# Altium PCB MU-RK3576J-MB.PcbDoc (part 1 of 2)
Units mm, origin at the board's own origin, x right, y up, seen from the top; angles counter-clockwise.
Board outline 110 x 90 mm, 10 copper layers (GTL_TOP_Hi, G1_L2_GND, G2_L3_GND, G3_L4_Hi, G4_L5_GND_PWR, G5_L6_GND_PWR, G6_L7_Hi, G7_L8_GND_PWR, G8_L9_GND, GBL_BOTTOM_Hi), stack 1.848 mm thick; 5 components, 737 nets, 20 pads, 0 vias.
Unrouted connection lines stored in the file: 705.
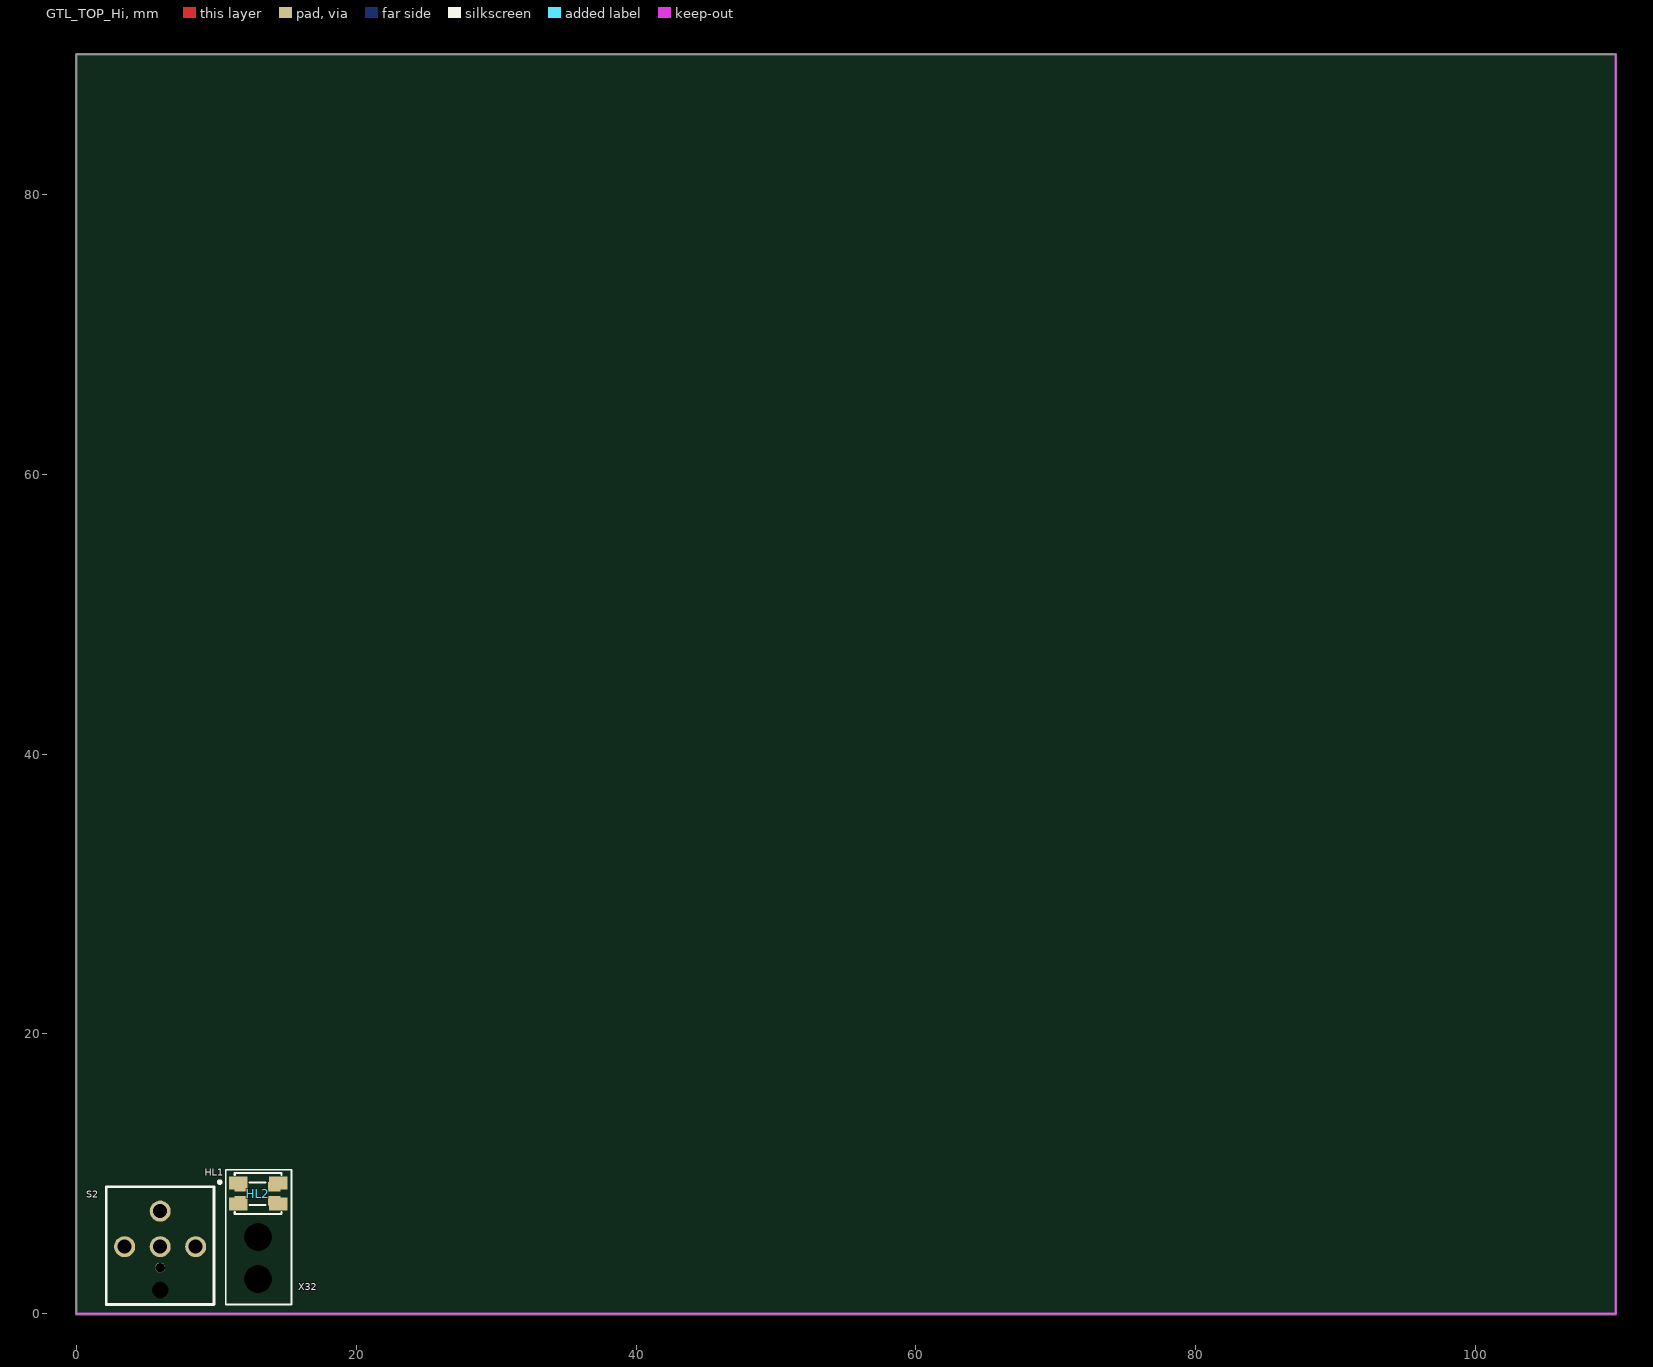
[diagram p0: GTL_TOP_Hi view]
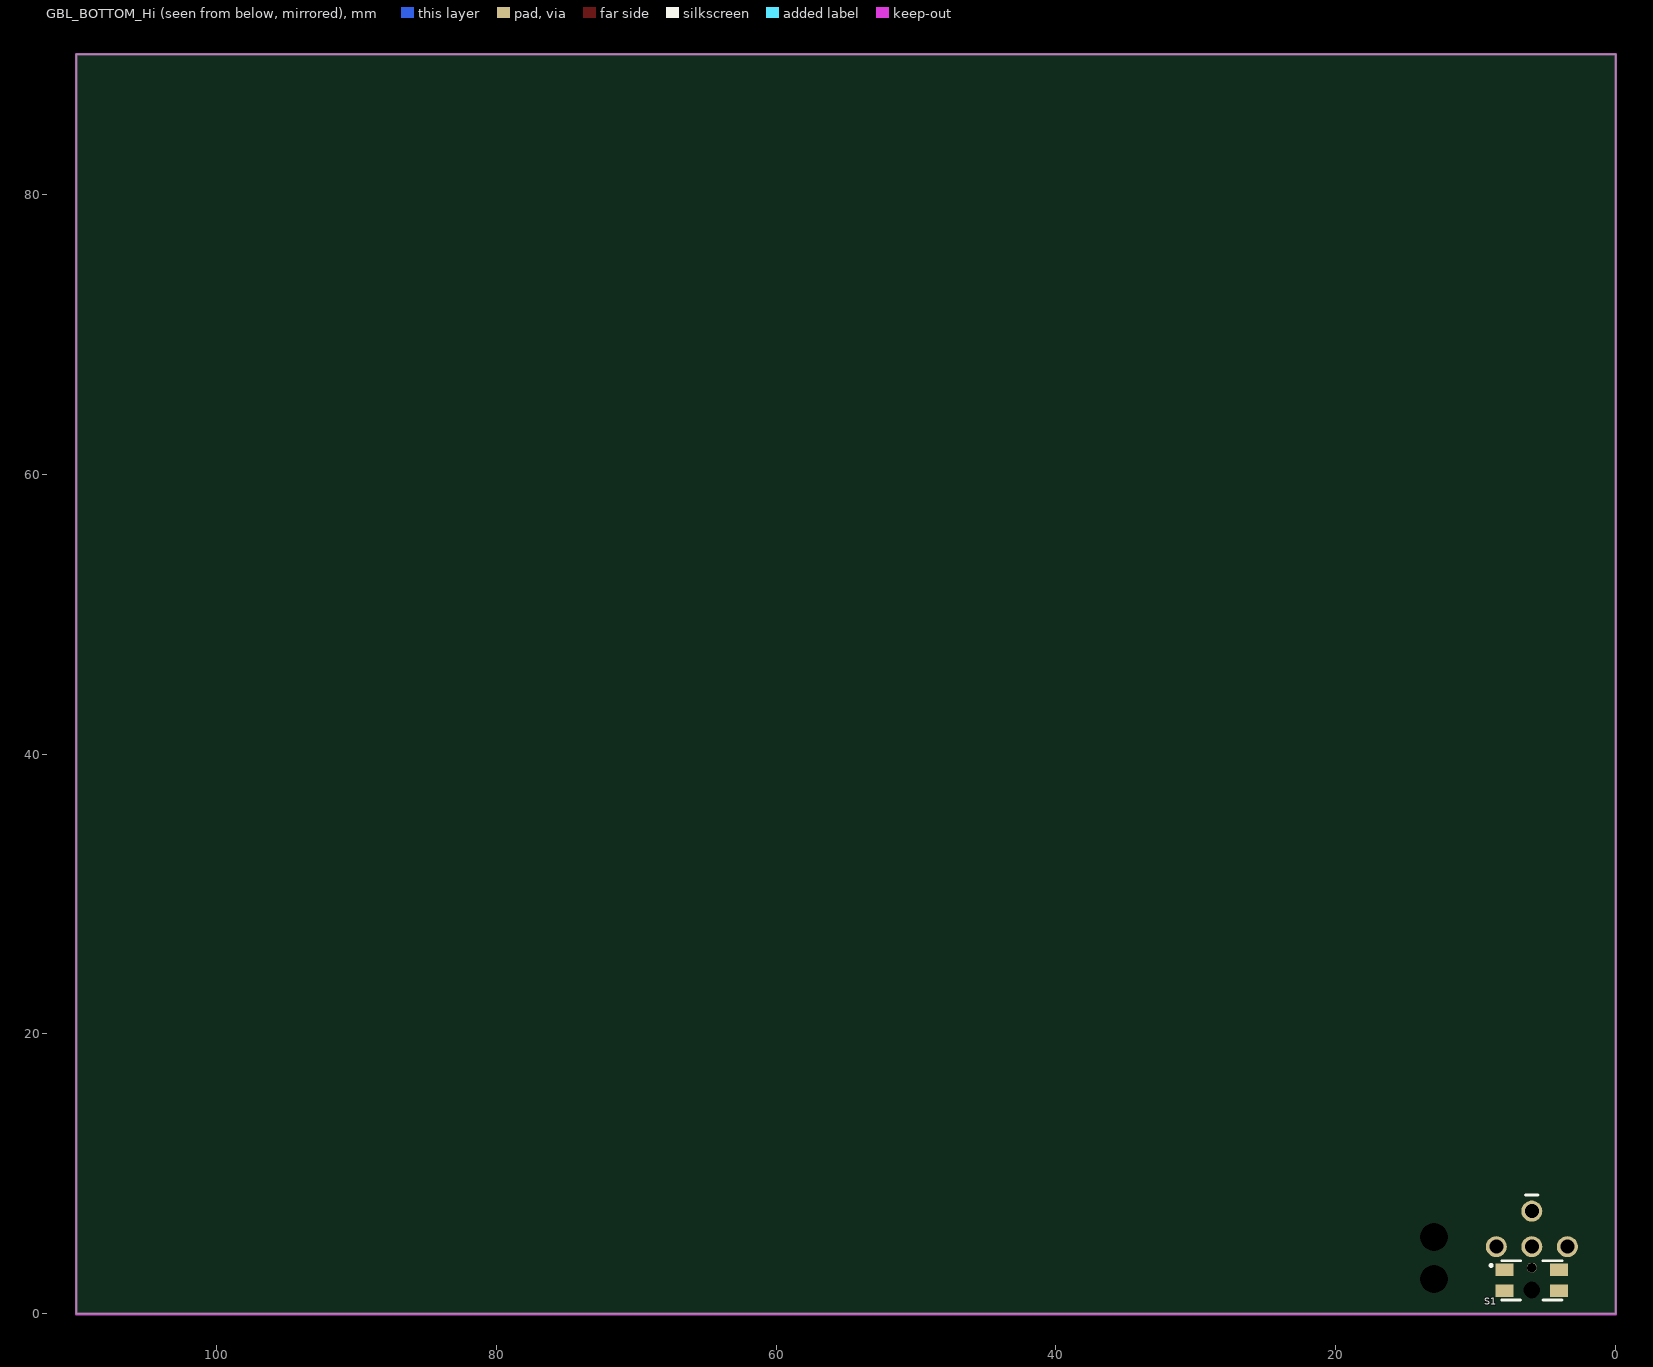
[diagram p1: GBL_BOTTOM_Hi view, seen from below]

## Layer stack, top to bottom
Top Solder: solder mask 0.0254, Solder Resist, Dk 3.5
GTL_TOP_Hi: signal copper 0.018
Dielectric 1: prepreg 0.045, FR4_HiTg170 PR, Dk 3.9
Dielectric1: prepreg 0.045, FR4_HiTg170 PR, Dk 3.9
G1_L2_GND: signal copper 0.035
Dielectric 2: prepreg 0.069, FR4_HiTg170 PR, Dk 4.2
Dielectric2: prepreg 0.069, FR4_HiTg170 PR, Dk 4.2
G2_L3_GND: signal copper 0.035
Dielectric3: core 0.25, FR4 HiTg170, Dk 4.3
G3_L4_Hi: signal copper 0.035
Dielectric 4: prepreg 0.069, FR4_HiTg170 PR, Dk 4.2
Dielectric4: prepreg 0.069, FR4_HiTg170 PR, Dk 4.2
G4_L5_GND_PWR: signal copper 0.035
Dielectric5: core 0.3, FR4 HiTg170, Dk 4.5
G5_L6_GND_PWR: signal copper 0.035
Dielectric6: prepreg 0.069, FR4_HiTg170 PR, Dk 4.2
Dielectric 6: prepreg 0.069, FR4_HiTg170 PR, Dk 4.2
G6_L7_Hi: signal copper 0.035
Dielectric7: core 0.25, FR4 HiTg170, Dk 4.3
G7_L8_GND_PWR: signal copper 0.035
Dielectric 8: prepreg 0.069, FR4_HiTg170 PR, Dk 4.2
Dielectric8: prepreg 0.069, FR4_HiTg170 PR, Dk 4.2
G8_L9_GND: signal copper 0.035
Dielectric9: prepreg 0.045, FR4_HiTg170 PR, Dk 3.9
Dielectric 9: prepreg 0.045, FR4_HiTg170 PR, Dk 3.9
GBL_BOTTOM_Hi: signal copper 0.018
Bottom Solder: solder mask 0.0254, Solder Resist, Dk 3.5

## Board outline
0,0 0,90 110,90 110,0

## Design rules (kind name [scope] priority, off if disabled: settings)
BoardOutlineClearance [All] p1: gap=0.254 ignorepadtopadclearanceinfootprint=FALSE except(0: Arc-SplitContinuation Track-SplitContinuation SMDPad-SplitContinuation THPad-SplitContinuation Via-SplitContinuation Fill-SplitContinuation Region-SplitContinuation Text-SplitContinuation; 0.4: Poly-OutlineEdge Poly-CavityEdge Poly-CutoutEdge Poly-SplitBarrior Poly-SplitContinuation)
Clearance Clearance_diff [InNetClass('PCIE_CLK')or InNetClass('PCIE_Z85') or InNetClass('USB')or InNet('A_DRAM_DQS1_P') or InNet('A_DRAM_DQS1_N') or InNetClass('ETH0_MDI')or InNetClass('ETH1_MDI') vs InPolygonClass('GND_Poly_18µm')] p1: gap=0.5 ignorepadtopadclearanceinfootprint=FALSE
Clearance Clearance_IsVia [IsVia vs InLayerClass('Layer_35µm')] p2: gap=0.15 ignorepadtopadclearanceinfootprint=FALSE
Clearance GND_Poly_Layers_18µm [InPolygonClass('GND_Poly_18µm')] p3: gap=0.15 ignorepadtopadclearanceinfootprint=FALSE
Clearance GND_Poly_Layers_35µm [InPolygonClass('GND_Poly_35µm')] p4: gap=0.2 ignorepadtopadclearanceinfootprint=FALSE
Clearance Clearance_WithinRoom_35µm [WithinRoom('CPU','eMMC','ETH' ) AND InLayerClass('Layer_35µm')] p5: gap=0.15 ignorepadtopadclearanceinfootprint=FALSE
Clearance Clearance_WithinRoom_18µm [WithinRoom('CPU','eMMC','ETH') AND InLayerClass('Layer_18µm')] p6: gap=0.1 ignorepadtopadclearanceinfootprint=FALSE
Clearance Clearance_LPDDR4_35µm [WithinRoom('LPDDR4') AND InLayerClass('Layer_35µm')] p7: gap=0.15 ignorepadtopadclearanceinfootprint=FALSE
Clearance Clearance_LPDDR4_18µm [WithinRoom('LPDDR4') AND InLayerClass('Layer_18µm')] p8: gap=0.1 ignorepadtopadclearanceinfootprint=FALSE
Clearance Clearance_ETH1_MDI [InNetClass('ETH1_MDI')] p9: gap=0.1 ignorepadtopadclearanceinfootprint=FALSE except(0.3: Arc-Arc Arc-Track Track-Track)
Clearance Clearance_RGMII0 [InNetClass('RGMII0')] p10: gap=0.1 ignorepadtopadclearanceinfootprint=FALSE except(0.3: Arc-Arc Arc-Track Track-Track)
Clearance Clearance_RGMII1 [InNetClass('RGMII1')] p11: gap=0.1 ignorepadtopadclearanceinfootprint=FALSE except(0.3: Arc-Arc Arc-Track Track-Track)
Clearance Clearance_ETH0_MDI [InNetClass('ETH0_MDI')] p12: gap=0.1 ignorepadtopadclearanceinfootprint=FALSE except(0.3: Arc-Arc Arc-Track Track-Track)
Clearance Clearance_eMMC [InNetClass('eMMC')] p13: gap=0.15 ignorepadtopadclearanceinfootprint=FALSE except(0.3: Arc-Arc Arc-Track Track-Track)
Clearance Clearance_DRAM_CA_CA [InNetClass('DRAM_CA') vs InNetClass('DRAM_CA')] p14: gap=0.1 ignorepadtopadclearanceinfootprint=FALSE except(0.28: Arc-Arc Arc-Track Track-Track)
Clearance Clearance_DRAM_STROBE1_0 [InNetClass('DRAM_STROBE_0') vs InNetClass('DRAM_STROBE_1')] p15: gap=0.1 ignorepadtopadclearanceinfootprint=FALSE except(0.28: Arc-Arc Arc-Track Track-Track)
Clearance Clearance_DRAM_STROBE1_CA [InNetClass('DRAM_STROBE_1') vs InNetClass('DRAM_CA')] p16: gap=0.1 ignorepadtopadclearanceinfootprint=FALSE except(0.28: Arc-Arc Arc-Track Track-Track)
Clearance Clearance_DRAM_STROBE1 [InNetClass('DRAM_STROBE_1') vs InNetClass('DRAM_STROBE_1')] p17: gap=0.1 ignorepadtopadclearanceinfootprint=FALSE except(0.28: Arc-Arc Arc-Track Track-Track)
Clearance Clearance_DRAM_STROBE0_CA [InNetClass('DRAM_STROBE_0') vs InNetClass('DRAM_CA')] p18: gap=0.1 ignorepadtopadclearanceinfootprint=FALSE except(0.28: Arc-Arc Arc-Track Track-Track)
Clearance Clearance_DRAM_STROBE0 [InNetClass('DRAM_STROBE_0') vs InNetClass('DRAM_STROBE_0')] p19: gap=0.1 ignorepadtopadclearanceinfootprint=FALSE except(0.28: Arc-Arc Arc-Track Track-Track)
Clearance Clearance_Layers_35µm [InLayerClass('Layer_35µm')] p20: gap=0.15 ignorepadtopadclearanceinfootprint=FALSE
Clearance Clearance_Layers_18µm [InLayerClass('Layer_18µm')] p21: gap=0.1 ignorepadtopadclearanceinfootprint=FALSE
ComponentClearance [InLayerClass('New Class') vs InLayerClass('New Class')] p1: gap=0 collisioncheckmode=3 verticalgap=0 showdistances=FALSE
ComponentClearance ComponentClearance_1 [All] p2: gap=0 collisioncheckmode=3 verticalgap=0 showdistances=FALSE
DiffPairsRouting LVDS_CSI_Z100 [InNetClass('LVDS') OR InNetClass('MIPI_CSI')] p1: maxlimit=0.24 minlimit=0.127 mostfreqgap=0.2 toplayer_maxgap=0.127 toplayer_prefgap=0.127 toplayer_minwidth=0.12 toplayer_maxwidth=0.12 toplayer_prefwidth=0.12 midlayer1_mingap=0.2 midlayer1_maxgap=0.2 midlayer1_minwidth=0.11 midlayer1_maxwidth=0.11 midlayer1_prefwidth=0.11 midlayer8_mingap=0.2 midlayer8_maxgap=0.2 midlayer8_minwidth=0.11 midlayer8_maxwidth=0.11 midlayer8_prefwidth=0.11 bottomlayer_maxgap=0.127 bottomlayer_prefgap=0.127 bottomlayer_minwidth=0.12 bottomlayer_maxwidth=0.12 bottomlayer_prefwidth=0.12 impedanceprofiledriven=TRUE impedanceprofileid={607ABF4F-00BC-431D-BA5F-23DEBB41297E} impedanceprofilevalue=100.000000 maxuncoupledlength=12.7
DiffPairsRouting PCIE_CLK_Z100 [InNetClass('PCIE_CLK')] p2: maxlimit=0.24 minlimit=0.127 mostfreqgap=0.2 toplayer_maxgap=0.127 toplayer_prefgap=0.127 toplayer_minwidth=0.12 toplayer_maxwidth=0.12 toplayer_prefwidth=0.12 midlayer1_mingap=0.2 midlayer1_maxgap=0.2 midlayer1_minwidth=0.11 midlayer1_maxwidth=0.11 midlayer1_prefwidth=0.11 midlayer8_minwidth=0.11 midlayer8_maxwidth=0.11 midlayer8_prefwidth=0.11 bottomlayer_maxgap=0.127 bottomlayer_prefgap=0.127 bottomlayer_minwidth=0.12 bottomlayer_maxwidth=0.12 bottomlayer_prefwidth=0.12 impedanceprofiledriven=TRUE impedanceprofileid={607ABF4F-00BC-431D-BA5F-23DEBB41297E} impedanceprofilevalue=100.000000 maxuncoupledlength=12.7
DiffPairsRouting USB_Z90 [InNetClass('USB')] p3: maxlimit=0.15 minlimit=0.127 mostfreqgap=0.127 toplayer_maxgap=0.127 toplayer_minwidth=0.14 toplayer_maxwidth=0.14 toplayer_prefwidth=0.14 bottomlayer_maxgap=0.127 bottomlayer_minwidth=0.14 bottomlayer_maxwidth=0.14 bottomlayer_prefwidth=0.14 impedanceprofiledriven=TRUE impedanceprofileid={213694E4-1860-4E9E-8F72-5B2D8769688F} impedanceprofilevalue=90.000000 maxuncoupledlength=12.7
DiffPairsRouting DRAM_STROBE0_A_Z100 [InDifferentialPairClass('DRAM_STROBE0_A_Diff')] p4: maxlimit=0.24 minlimit=0.127 mostfreqgap=0.2 toplayer_maxgap=0.127 toplayer_prefgap=0.127 toplayer_minwidth=0.12 toplayer_maxwidth=0.12 toplayer_prefwidth=0.12 midlayer1_mingap=0.2 midlayer1_maxgap=0.2 midlayer1_minwidth=0.11 midlayer1_maxwidth=0.11 midlayer1_prefwidth=0.11 midlayer8_minwidth=0.11 midlayer8_maxwidth=0.11 midlayer8_prefwidth=0.11 bottomlayer_maxgap=0.127 bottomlayer_prefgap=0.127 bottomlayer_minwidth=0.12 bottomlayer_maxwidth=0.12 bottomlayer_prefwidth=0.12 impedanceprofiledriven=TRUE impedanceprofileid={607ABF4F-00BC-431D-BA5F-23DEBB41297E} impedanceprofilevalue=100.000000 maxuncoupledlength=12.7
DiffPairsRouting DRAM_STROBE1_A_Z100 [InDifferentialPairClass('DRAM_STROBE1_A_Diff')] p5: maxlimit=0.24 minlimit=0.127 mostfreqgap=0.2 toplayer_maxgap=0.127 toplayer_prefgap=0.127 toplayer_minwidth=0.12 toplayer_maxwidth=0.12 toplayer_prefwidth=0.12 midlayer1_mingap=0.2 midlayer1_maxgap=0.2 midlayer1_minwidth=0.11 midlayer1_maxwidth=0.11 midlayer1_prefwidth=0.11 midlayer8_minwidth=0.11 midlayer8_maxwidth=0.11 midlayer8_prefwidth=0.11 bottomlayer_maxgap=0.127 bottomlayer_prefgap=0.127 bottomlayer_minwidth=0.12 bottomlayer_maxwidth=0.12 bottomlayer_prefwidth=0.12 impedanceprofiledriven=TRUE impedanceprofileid={607ABF4F-00BC-431D-BA5F-23DEBB41297E} impedanceprofilevalue=100.000000 maxuncoupledlength=12.7
DiffPairsRouting DRAM_STROBE1_B_Z100 [InDifferentialPairClass('DRAM_STROBE1_B_Diff')] p6: maxlimit=0.24 minlimit=0.127 mostfreqgap=0.2 toplayer_maxgap=0.127 toplayer_prefgap=0.127 toplayer_minwidth=0.12 toplayer_maxwidth=0.12 toplayer_prefwidth=0.12 midlayer1_mingap=0.2 midlayer1_maxgap=0.2 midlayer1_minwidth=0.11 midlayer1_maxwidth=0.11 midlayer1_prefwidth=0.11 midlayer8_minwidth=0.11 midlayer8_maxwidth=0.11 midlayer8_prefwidth=0.11 bottomlayer_maxgap=0.127 bottomlayer_prefgap=0.127 bottomlayer_minwidth=0.12 bottomlayer_maxwidth=0.12 bottomlayer_prefwidth=0.12 impedanceprofiledriven=TRUE impedanceprofileid={607ABF4F-00BC-431D-BA5F-23DEBB41297E} impedanceprofilevalue=100.000000 maxuncoupledlength=12.7
DiffPairsRouting DRAM_STROBE0_B_Z100 [InDifferentialPairClass('DRAM_STROBE0_B_Diff')] p7: maxlimit=0.24 minlimit=0.127 mostfreqgap=0.2 toplayer_maxgap=0.127 toplayer_prefgap=0.127 toplayer_minwidth=0.12 toplayer_maxwidth=0.12 toplayer_prefwidth=0.12 midlayer1_mingap=0.2 midlayer1_maxgap=0.2 midlayer1_minwidth=0.11 midlayer1_maxwidth=0.11 midlayer1_prefwidth=0.11 midlayer8_minwidth=0.11 midlayer8_maxwidth=0.11 midlayer8_prefwidth=0.11 bottomlayer_maxgap=0.127 bottomlayer_prefgap=0.127 bottomlayer_minwidth=0.12 bottomlayer_maxwidth=0.12 bottomlayer_prefwidth=0.12 impedanceprofiledriven=TRUE impedanceprofileid={607ABF4F-00BC-431D-BA5F-23DEBB41297E} impedanceprofilevalue=100.000000 maxuncoupledlength=12.7
DiffPairsRouting ETH0_MDI_Z100 [InNetClass('ETH0_MDI')] p8: maxlimit=0.24 minlimit=0.127 mostfreqgap=0.2 toplayer_maxgap=0.127 toplayer_prefgap=0.127 toplayer_minwidth=0.12 toplayer_maxwidth=0.12 toplayer_prefwidth=0.12 midlayer1_mingap=0.2 midlayer1_maxgap=0.2 midlayer1_minwidth=0.11 midlayer1_maxwidth=0.11 midlayer1_prefwidth=0.11 midlayer8_minwidth=0.11 midlayer8_maxwidth=0.11 midlayer8_prefwidth=0.11 bottomlayer_maxgap=0.127 bottomlayer_prefgap=0.127 bottomlayer_minwidth=0.12 bottomlayer_maxwidth=0.12 bottomlayer_prefwidth=0.12 impedanceprofiledriven=TRUE impedanceprofileid={607ABF4F-00BC-431D-BA5F-23DEBB41297E} impedanceprofilevalue=100.000000 maxuncoupledlength=12.7
DiffPairsRouting DRAM_CLK_Z100 [InDifferentialPairClass('A_DRAM_CLK','B_DRAM_CLK')] p9: maxlimit=0.24 minlimit=0.127 mostfreqgap=0.2 toplayer_maxgap=0.127 toplayer_prefgap=0.127 toplayer_minwidth=0.12 toplayer_maxwidth=0.12 toplayer_prefwidth=0.12 midlayer1_mingap=0.2 midlayer1_maxgap=0.2 midlayer1_minwidth=0.11 midlayer1_maxwidth=0.11 midlayer1_prefwidth=0.11 midlayer8_mingap=0.2 midlayer8_maxgap=0.2 midlayer8_minwidth=0.11 midlayer8_maxwidth=0.11 midlayer8_prefwidth=0.11 bottomlayer_maxgap=0.127 bottomlayer_prefgap=0.127 bottomlayer_minwidth=0.12 bottomlayer_maxwidth=0.12 bottomlayer_prefwidth=0.12 impedanceprofiledriven=TRUE impedanceprofileid={607ABF4F-00BC-431D-BA5F-23DEBB41297E} impedanceprofilevalue=100.000000 maxuncoupledlength=12.7
DiffPairsRouting ETH1_MDI_Z100 [InNetClass('ETH1_MDI')] p10: maxlimit=0.24 minlimit=0.127 mostfreqgap=0.2 toplayer_maxgap=0.127 toplayer_prefgap=0.127 toplayer_minwidth=0.12 toplayer_maxwidth=0.12 toplayer_prefwidth=0.12 midlayer1_mingap=0.2 midlayer1_maxgap=0.2 midlayer1_minwidth=0.11 midlayer1_maxwidth=0.11 midlayer1_prefwidth=0.11 midlayer8_minwidth=0.11 midlayer8_maxwidth=0.11 midlayer8_prefwidth=0.11 bottomlayer_maxgap=0.127 bottomlayer_prefgap=0.127 bottomlayer_minwidth=0.12 bottomlayer_maxwidth=0.12 bottomlayer_prefwidth=0.12 impedanceprofiledriven=TRUE impedanceprofileid={607ABF4F-00BC-431D-BA5F-23DEBB41297E} impedanceprofilevalue=100.000000 maxuncoupledlength=12.7
DiffPairsRouting HDMI [InNetClass('HDMI')] p11: maxlimit=0.24 minlimit=0.127 mostfreqgap=0.2 toplayer_maxgap=0.127 toplayer_prefgap=0.127 toplayer_minwidth=0.12 toplayer_maxwidth=0.12 toplayer_prefwidth=0.12 midlayer1_mingap=0.2 midlayer1_maxgap=0.2 midlayer1_minwidth=0.11 midlayer1_maxwidth=0.11 midlayer1_prefwidth=0.11 midlayer8_minwidth=0.11 midlayer8_maxwidth=0.11 midlayer8_prefwidth=0.11 bottomlayer_maxgap=0.127 bottomlayer_prefgap=0.127 bottomlayer_minwidth=0.12 bottomlayer_maxwidth=0.12 bottomlayer_prefwidth=0.12 impedanceprofiledriven=TRUE impedanceprofileid={607ABF4F-00BC-431D-BA5F-23DEBB41297E} impedanceprofilevalue=100.000000 maxuncoupledlength=12.7
DiffPairsRouting [All] p12: maxlimit=0.4 minlimit=0.16 mostfreqgap=0.4 toplayer_minwidth=0.2 toplayer_maxwidth=1 toplayer_prefwidth=0.35 midlayer1_minwidth=0.2 midlayer1_maxwidth=1 midlayer1_prefwidth=0.35 midlayer2_minwidth=0.2 midlayer2_maxwidth=1 midlayer2_prefwidth=0.35 midlayer3_minwidth=0.2 midlayer3_maxwidth=1 midlayer3_prefwidth=0.35 midlayer4_minwidth=0.2 midlayer4_maxwidth=1 midlayer4_prefwidth=0.35 midlayer5_minwidth=0.2 midlayer5_maxwidth=1 midlayer5_prefwidth=0.35 midlayer6_minwidth=0.2 midlayer6_maxwidth=1 midlayer6_prefwidth=0.35 midlayer7_minwidth=0.2 midlayer7_maxwidth=1 midlayer7_prefwidth=0.35 midlayer8_minwidth=0.2 midlayer8_maxwidth=1 midlayer8_prefwidth=0.35 bottomlayer_minwidth=0.2 bottomlayer_maxwidth=1 bottomlayer_prefwidth=0.35 maxuncoupledlength=12.7
FabricationTestpoint [(IsPad And (OnTopLayer Or OnBottomLayer))] p1: side=3 testpointundercomponent=TRUE minsize=1.016 maxsize=2.54 preferedsize=1.524 minholesize=0 maxholesize=1.016 preferedholesize=0.813 testpointgrid=0.025 allowsidetop=TRUE allowsidebottom=TRUE usegrid=TRUE gridtolerance=0
Height [All] p1: minheight=0 maxheight=50 prefheight=12.7
HoleSize [All] p1: absolutevalues=TRUE maxlimit=5 minlimit=0.025 maxpercent=80.000 minpercent=20.000
HoleToHoleClearance HoleToHoleClearance_1 [InPadClass('pad_mult') vs InPadClass('pad_mult')] p1: gap=0 allowstackedmicrovias=TRUE
HoleToHoleClearance [All] p2: gap=0.254 allowstackedmicrovias=TRUE
MatchedLengths SD_m_length [InxSignalClass('xSignals_SD')] p1: tolerance=25.4 checknetsindiffpair=FALSE checkdiffpairvsdiffpair=TRUE checkxsignals=TRUE checkothers=TRUE usedelayunits=TRUE delaytolerance=8.000000
MatchedLengths LVDS_m_length [InxSignalClass('LVDSxSignals')] p2: tolerance=25.4 checknetsindiffpair=FALSE checkdiffpairvsdiffpair=TRUE checkxsignals=TRUE checkothers=TRUE usedelayunits=TRUE delaytolerance=8.000000
MatchedLengths CSI_m_length [InxSignalClass('CSIxSignals')] p3: tolerance=25.4 checknetsindiffpair=FALSE checkdiffpairvsdiffpair=TRUE checkxsignals=TRUE checkothers=TRUE usedelayunits=TRUE delaytolerance=8.000000
MatchedLengths BMC_QSPI_m_length [InxSignalClass('BMC_QSPIxSignals')] p4: tolerance=4 checknetsindiffpair=FALSE checkdiffpairvsdiffpair=TRUE checkxsignals=TRUE checkothers=TRUE
MatchedLengths FSPI_m_length [InxSignalClass('FSPI')] p5: tolerance=3 checknetsindiffpair=FALSE checkdiffpairvsdiffpair=TRUE checkxsignals=TRUE checkothers=TRUE usedelayunits=TRUE delaytolerance=30.000000
MatchedLengths HDMI_DIFF [InxSignalClass('HDMI_xSignals')] p6: tolerance=25.4 checknetsindiffpair=TRUE checkdiffpairvsdiffpair=FALSE checkxsignals=FALSE checkothers=FALSE usedelayunits=TRUE delaytolerance=2.000000
MatchedLengths LVDS_DIFF [InxSignalClass('LVDSxSignals')] p7: tolerance=25.4 checknetsindiffpair=TRUE checkdiffpairvsdiffpair=FALSE checkxsignals=FALSE checkothers=FALSE usedelayunits=TRUE delaytolerance=2.000000
MatchedLengths CSI_DIFF [InxSignalClass('CSIxSignals')] p8: tolerance=25.4 checknetsindiffpair=TRUE checkdiffpairvsdiffpair=FALSE checkxsignals=FALSE checkothers=FALSE usedelayunits=TRUE delaytolerance=2.000000
MatchedLengths USB3_OTG0_m_length_diff [InxSignalClass('USB3_OTG0')] p9: tolerance=25.4 checknetsindiffpair=TRUE checkdiffpairvsdiffpair=FALSE checkxsignals=FALSE checkothers=FALSE usedelayunits=TRUE delaytolerance=2.000000
MatchedLengths HDMI_m_length [InxSignalClass('HDMI_xSignals')] p10: tolerance=25.4 checknetsindiffpair=FALSE checkdiffpairvsdiffpair=TRUE checkxsignals=TRUE checkothers=TRUE usedelayunits=TRUE delaytolerance=10.000000
MatchedLengths USB3_HOST1_m_length_diff [InxSignalClass('USB3_HOST1')] p11: tolerance=25.4 checknetsindiffpair=TRUE checkdiffpairvsdiffpair=FALSE checkxsignals=FALSE checkothers=FALSE usedelayunits=TRUE delaytolerance=2.000000
MatchedLengths PCIE_CLK_m_length_diff [InNetClass('PCIE_CLK')] p12: tolerance=25.4 checknetsindiffpair=TRUE checkdiffpairvsdiffpair=FALSE checkxsignals=FALSE checkothers=FALSE usedelayunits=TRUE delaytolerance=2.000000
MatchedLengths PCIE_Z85_m_length_diff [InNetClass('PCIE_Z85')] p13: tolerance=25.4 checknetsindiffpair=TRUE checkdiffpairvsdiffpair=FALSE checkxsignals=FALSE checkothers=FALSE usedelayunits=TRUE delaytolerance=3.000000
MatchedLengths ETH1_MDI_m_length_diff [InNetClass('ETH1_MDI')] p14: tolerance=25.4 checknetsindiffpair=FALSE checkdiffpairvsdiffpair=TRUE checkxsignals=TRUE checkothers=TRUE usedelayunits=TRUE delaytolerance=5.000000
MatchedLengths ETH0_MDI_m_length_diff [InNetClass('ETH0_MDI')] p15: tolerance=25.4 checknetsindiffpair=FALSE checkdiffpairvsdiffpair=TRUE checkxsignals=TRUE checkothers=TRUE usedelayunits=TRUE delaytolerance=5.000000
MatchedLengths RGMII0_m_length [InxSignalClass('RGMII0')] p16: tolerance=25.4 checknetsindiffpair=FALSE checkdiffpairvsdiffpair=TRUE checkxsignals=TRUE checkothers=TRUE usedelayunits=TRUE delaytolerance=8.000000
MatchedLengths RGMII1_m_length [InxSignalClass('RGMII1')] p17: tolerance=25.4 checknetsindiffpair=FALSE checkdiffpairvsdiffpair=TRUE checkxsignals=TRUE checkothers=TRUE usedelayunits=TRUE delaytolerance=8.000000
MatchedLengths DRAM_STROBE_Diff_m_length [InDifferentialPairClass('DRAM_STROBE0_A_Diff') or InDifferentialPairClass('DRAM_STROBE0_B_Diff') or InDifferentialPairClass('DRAM_STROBE1_A_Diff') or InDifferentialPairClass('DRAM_STROBE1_B_Diff')] p18: tolerance=25.4 checknetsindiffpair=TRUE checkdiffpairvsdiffpair=FALSE checkxsignals=FALSE checkothers=FALSE usedelayunits=TRUE delaytolerance=2.000000
MatchedLengths DRAM_CA__m_length [InNetClass('DRAM_CA')] p19: tolerance=25.4 checknetsindiffpair=FALSE checkdiffpairvsdiffpair=TRUE checkxsignals=TRUE checkothers=TRUE usedelayunits=TRUE delaytolerance=8.000000
MatchedLengths DRAM_STROBE_1_m_length [InNetClass('DRAM_STROBE_1')] p20: tolerance=25.4 checknetsindiffpair=FALSE checkdiffpairvsdiffpair=TRUE checkxsignals=TRUE checkothers=TRUE usedelayunits=TRUE delaytolerance=8.000000
MatchedLengths DRAM_STROBE_0_m_length [InNetClass('DRAM_STROBE_0')] p21: tolerance=0.2 checknetsindiffpair=FALSE checkdiffpairvsdiffpair=TRUE checkxsignals=TRUE checkothers=TRUE usedelayunits=TRUE delaytolerance=8.000000
MatchedLengths ETH1_MDI_m_length [InNetClass('ETH1_MDI')] p22: tolerance=0.3 checknetsindiffpair=TRUE checkdiffpairvsdiffpair=FALSE checkxsignals=FALSE checkothers=FALSE usedelayunits=TRUE delaytolerance=2.000000
MatchedLengths ETH0_MDI_m_length [InNetClass('ETH0_MDI')] p23: tolerance=0.3 checknetsindiffpair=TRUE checkdiffpairvsdiffpair=FALSE checkxsignals=FALSE checkothers=FALSE usedelayunits=TRUE delaytolerance=2.000000
MatchedLengths WL_SDIO_m_length [InxSignalClass('xSignals_WL_SDIO')] p24: tolerance=0.3 checknetsindiffpair=FALSE checkdiffpairvsdiffpair=TRUE checkxsignals=TRUE checkothers=TRUE usedelayunits=TRUE delaytolerance=10.000000
MatchedLengths DDR_Diff_CLK_B [InDifferentialPairClass('B_DRAM_CLK')] p25: tolerance=25.4 checknetsindiffpair=TRUE checkdiffpairvsdiffpair=FALSE checkxsignals=FALSE checkothers=FALSE usedelayunits=TRUE delaytolerance=2.000000
MatchedLengths DDR_Diff_CLK_A [InDifferentialPairClass('A_DRAM_CLK')] p26: tolerance=25.4 checknetsindiffpair=TRUE checkdiffpairvsdiffpair=FALSE checkxsignals=FALSE checkothers=FALSE usedelayunits=TRUE delaytolerance=2.000000
MatchedLengths eMMC_m_length [InNetClass('eMMC')] p27: tolerance=0.3 checknetsindiffpair=FALSE checkdiffpairvsdiffpair=TRUE checkxsignals=TRUE checkothers=TRUE usedelayunits=TRUE delaytolerance=8.000000
MaximumViaCount DRAM_STROBE1_B_Diff_Via [InDifferentialPairClass('DRAM_STROBE1_B_Diff')] p1: limit=2
MaximumViaCount DRAM_STROBE1_A_Diff_Via [InDifferentialPairClass('DRAM_STROBE1_A_Diff')] p2: limit=2
MaximumViaCount DRAM_STROBE0_B_Diff_Via [InDifferentialPairClass('DRAM_STROBE0_B_Diff')] p3: limit=2
MaximumViaCount DRAM_STROBE0_A_Diff_Via [InDifferentialPairClass('DRAM_STROBE0_A_Diff')] p4: limit=2
MaximumViaCount B_DRAM_CLK_Via [InDifferentialPairClass('B_DRAM_CLK')] p5: limit=2
MaximumViaCount A_DRAM_CLK_Via [InDifferentialPairClass('A_DRAM_CLK')] p6: limit=2
MaximumViaCount DRAM_STROBE1_Via [InNetClass('DRAM_STROBE_1')] p7: limit=2
MaximumViaCount DRAM_STROBE0_Via [InNetClass('DRAM_STROBE_0')] p8: limit=2
MaximumViaCount DRAM_CA_Via [InNetClass('DRAM_CA')] p9: limit=2
MaximumViaCount RGMII1_Via [InNetClass('RGMII1')] p10: limit=2
MaximumViaCount RGMII0_Via [InNetClass('RGMII0')] p11: limit=2
MaximumViaCount ETH1_MDI_Via [InNetClass('ETH1_MDI')] p12: limit=2
MaximumViaCount ETH0_MDI_Via [InNetClass('ETH0_MDI')] p13: limit=2
MaximumViaCount WL_SDIO_Via [InNetClass('WL_SDIO')] p14: limit=6
MaximumViaCount SDIO_Via [InNetClass('SD')] p15: limit=6
MaximumViaCount PCIE20_Via [InNetClass('PCIE20_Z85')] p16: limit=2
MaximumViaCount PCIE20CLK_Via [InNetClass('PCIE20CLK')] p17: limit=2
MaximumViaCount HDMI_Via [InNetClass('HDMI')] p18: limit=7
MaximumViaCount USB_Via [InNetClass('USB')] p19: limit=6
MinimumSolderMaskSliver [All] p1: minsoldermaskwidth=0
NetAntennae NetTie [InComponent('NT2') or  InComponent('NT3')] p1: netantennaetolerance=1
NetAntennae [All] p2: netantennaetolerance=0
PlaneClearance [All] p1: clearance=0.5
PlaneConnect [All] p1: planeconnectstyle=Direct reliefexpansion=0.5 reliefentries=4 reliefconductorwidth=0.25 reliefairgap=0.25
PolygonConnect PolygonConnect_pwr [InPolygonClass('PWR')] p1: connectstyle=Direct reliefconductorwidth=0.254 reliefentries=4 polygonreliefangle="90 Angle" airgapwidth=0.254
PolygonConnect PolygonConnect_via [IsVia] p2: connectstyle=Direct reliefconductorwidth=0.254 reliefentries=4 polygonreliefangle="90 Angle" airgapwidth=0.254
PolygonConnect [All] p3: connectstyle=Relief reliefconductorwidth=0.2 reliefentries=4 polygonreliefangle="90 Angle" airgapwidth=0.2
RoutingVias [All] p1: holewidth=0.2 width=0.4 viastyle="Through Hole" minholewidth=0.2 minwidth=0.4 maxholewidth=0.5 maxwidth=0.8
SilkToSilkClearance [All] p1: silktosilkclearance=0.2
SilkToSolderMaskClearance SilkscreenOverComponentPads [IsPad] p1: minsilkscreentomaskgap=0 clearancetoexposedcopper=TRUE
SolderMaskExpansion [All] p1: expansion=0.1 istentingtop=FALSE
SupplyNets "Schematic Supply Nets_55" [InNet('+1.8V_VDD_PLL_OSC')] p1: voltage=0.000
SupplyNets "Schematic Supply Nets_54" [InNet('+3.3V_VCC')] p2: voltage=0.000
SupplyNets "Schematic Supply Nets_53" [InNet('SH_1')] p3: voltage=0.000
SupplyNets "Schematic Supply Nets_52" [InNet('+5V_VCC_SYS')] p4: voltage=0.000
SupplyNets "Schematic Supply Nets_51" [InNet('DREG3.3V')] p5: voltage=0.000
SupplyNets "Schematic Supply Nets_50" [InNet('VCC_3.3V_USB')] p6: voltage=0.000
SupplyNets "Schematic Supply Nets_49" [InNet('EXT_GND1')] p7: voltage=0.000
SupplyNets "Schematic Supply Nets_48" [InNet('SH2')] p8: voltage=0.000
SupplyNets "Schematic Supply Nets_47" [InNet('+0.9V_VDD_NPU')] p9: voltage=0.000
SupplyNets "Schematic Supply Nets_46" [InNet('EXT_GND2')] p10: voltage=0.000
SupplyNets "Schematic Supply Nets_45" [InNet('+5V_WDT')] p11: voltage=0.000
SupplyNets "Schematic Supply Nets_44" [InNet('+3.3V_VCC_SYS')] p12: voltage=0.000
SupplyNets "Schematic Supply Nets_43" [InNet('VDDA_0.9V_USB')] p13: voltage=0.000
SupplyNets "Schematic Supply Nets_42" [InNet('+1.8V_PLL_VDDA')] p14: voltage=0.000
SupplyNets "Schematic Supply Nets_41" [InNet('+1.8V_VCC_PHY0_IO')] p15: voltage=0.000
SupplyNets "Schematic Supply Nets_40" [InNet('+0.9V_VDDA_PMU')] p16: voltage=0.000
SupplyNets "Schematic Supply Nets_39" [InNet('+1V_VCC_PHY0')] p17: voltage=0.000
SupplyNets "Schematic Supply Nets_38" [InNet('VBUS_USB3_OTG0')] p18: voltage=0.000
SupplyNets "Schematic Supply Nets_37" [InNet('+1V_VCC_PHY1')] p19: voltage=0.000
SupplyNets "Schematic Supply Nets_36" [InNet('+1V_VDD_CPU')] p20: voltage=0.000
SupplyNets "Schematic Supply Nets_35" [InNet('SH_3')] p21: voltage=0.000
SupplyNets "Schematic Supply Nets_34" [InNet('+0.9V_VDDA')] p22: voltage=0.000
SupplyNets "Schematic Supply Nets_33" [InNet('VCC_RTC')] p23: voltage=0.000
SupplyNets "Schematic Supply Nets_32" [InNet('+3.3V_VCCIO_SD')] p24: voltage=0.000
SupplyNets "Schematic Supply Nets_31" [InNet('+5V_VBUS_DBG')] p25: voltage=0.000
SupplyNets "Schematic Supply Nets_30" [InNet('GND')] p26: voltage=0.000
SupplyNets "Schematic Supply Nets_29" [InNet('+3.3V_VCCIO')] p27: voltage=0.000
SupplyNets "Schematic Supply Nets_28" [InNet('+3.3V_VCC_GPS')] p28: voltage=0.000
SupplyNets "Schematic Supply Nets_27" [InNet('+0.9V_VDD_LOGIC')] p29: voltage=0.000
SupplyNets "Schematic Supply Nets_26" [InNet('+1.5V_mPCIe')] p30: voltage=0.000
SupplyNets "Schematic Supply Nets_25" [InNet('+3.3V_MCU')] p31: voltage=0.000
SupplyNets "Schematic Supply Nets_24" [InNet('+1.8V_VCCA_IMAGE')] p32: voltage=0.000
SupplyNets "Schematic Supply Nets_23" [InNet('+VDD_PD')] p33: voltage=0.000
SupplyNets "Schematic Supply Nets_22" [InNet('+0.9V_AVDD_MIPI')] p34: voltage=0.000
SupplyNets "Schematic Supply Nets_21" [InNet('+1.8V_AVDD_MIPI')] p35: voltage=0.000
SupplyNets "Schematic Supply Nets_20" [InNet('HDMI_5V')] p36: voltage=0.000
SupplyNets "Schematic Supply Nets_19" [InNet('+0.9V_VDDA_IMAGE')] p37: voltage=0.000
SupplyNets "Schematic Supply Nets_18" [InNet('+1.8V_MCU')] p38: voltage=0.000
SupplyNets "Schematic Supply Nets_17" [InNet('VDD_CPU_COM')] p39: voltage=0.000
SupplyNets "Schematic Supply Nets_16" [InNet('+1.8V_VCC_PHY1_IO')] p40: voltage=0.000
SupplyNets "Schematic Supply Nets_15" [InNet('+1.8V_VCCA')] p41: voltage=0.000
SupplyNets "Schematic Supply Nets_14" [InNet('+5V_VCC_SYS_OUT')] p42: voltage=0.000
SupplyNets "Schematic Supply Nets_13" [InNet('+0.9V_VDD_GPU')] p43: voltage=0.000
SupplyNets "Schematic Supply Nets_12" [InNet('+1.8V_VCCA_PMU')] p44: voltage=0.000
SupplyNets "Schematic Supply Nets_11" [InNet('+3.3V_VCC_PMU')] p45: voltage=0.000
SupplyNets "Schematic Supply Nets_10" [InNet('VBUS_USB3_HOST1')] p46: voltage=0.000
SupplyNets "Schematic Supply Nets_9" [InNet('+1.1V_VDD_DDR')] p47: voltage=0.000
SupplyNets "Schematic Supply Nets_8" [InNet('+5V_OUT')] p48: voltage=0.000
SupplyNets "Schematic Supply Nets_7" [InNet('+5V_VCC_USB')] p49: voltage=0.000
SupplyNets "Schematic Supply Nets_6" [InNet('+1.8V_VCC')] p50: voltage=0.000
SupplyNets "Schematic Supply Nets_5" [InNet('+5V_VCC_USB_AUDIO')] p51: voltage=0.000
SupplyNets "Schematic Supply Nets_4" [InNet('+VDC_IN_EXT')] p52: voltage=0.000
SupplyNets "Schematic Supply Nets_3" [InNet('+3.3V_VCC_SD')] p53: voltage=0.000
SupplyNets "Schematic Supply Nets_2" [InNet('VDDA_1.8V_USB')] p54: voltage=0.000
SupplyNets "Schematic Supply Nets_1" [InNet('+3.3V_USB_DBG')] p55: voltage=0.000
SupplyNets "Schematic Supply Nets" [InNet('+VDC_IN_MAIN')] p56: voltage=0.000
UnpouredPolygon [All] p1: allowunpoured=TRUE allowshelved=TRUE
Width FSPI_Z50 [InNetClass('FSPI')] p1: maxlimit=0.14 minlimit=0.11 preferedwidth=0.11 toplayer_minwidth=0.14 toplayer_prefwidth=0.14 midlayer1_maxwidth=0.11 midlayer5_maxwidth=0.11 bottomlayer_minwidth=0.14 bottomlayer_prefwidth=0.14 impedanceprofiledriven=TRUE impedanceprofileid={20A9D3A6-B0EB-4B75-B440-677AE738CD6D} impedanceprofilevalue=50.000000 minimp=50.000000 maximp=50.000000 favimp=50.000000
Width DRAM_CA_Z50 [InNetClass('DRAM_CA')] p2: maxlimit=0.15 minlimit=0.11 preferedwidth=0.11 toplayer_minwidth=0.14 toplayer_maxwidth=0.14 toplayer_prefwidth=0.14 midlayer1_maxwidth=0.11 midlayer5_maxwidth=0.11 bottomlayer_minwidth=0.14 bottomlayer_maxwidth=0.14 bottomlayer_prefwidth=0.14 impedanceprofiledriven=TRUE impedanceprofileid={20A9D3A6-B0EB-4B75-B440-677AE738CD6D} impedanceprofilevalue=50.000000 minimp=50.000000 maximp=50.000000 favimp=50.000000
Width DRAM_STROBE0_Z50 [InNetClass('DRAM_STROBE_0')] p3: maxlimit=0.14 minlimit=0.11 preferedwidth=0.11 toplayer_minwidth=0.14 toplayer_prefwidth=0.14 midlayer1_maxwidth=0.11 midlayer5_maxwidth=0.11 bottomlayer_minwidth=0.14 bottomlayer_prefwidth=0.14 impedanceprofiledriven=TRUE impedanceprofileid={20A9D3A6-B0EB-4B75-B440-677AE738CD6D} impedanceprofilevalue=50.000000 minimp=50.000000 maximp=50.000000 favimp=50.000000
Width DRAM_STROBE1_Z50 [InNetClass('DRAM_STROBE_1')] p4: maxlimit=0.14 minlimit=0.11 preferedwidth=0.11 toplayer_minwidth=0.14 toplayer_prefwidth=0.14 midlayer1_maxwidth=0.11 midlayer5_maxwidth=0.11 bottomlayer_minwidth=0.14 bottomlayer_prefwidth=0.14 impedanceprofiledriven=TRUE impedanceprofileid={20A9D3A6-B0EB-4B75-B440-677AE738CD6D} impedanceprofilevalue=50.000000 minimp=50.000000 maximp=50.000000 favimp=50.000000
Width RGMII0_Z50 [InNetClass('RGMII0')] p5: maxlimit=0.14 minlimit=0.11 preferedwidth=0.11 toplayer_minwidth=0.14 toplayer_prefwidth=0.14 midlayer1_maxwidth=0.11 midlayer5_maxwidth=0.11 bottomlayer_minwidth=0.14 bottomlayer_prefwidth=0.14 impedanceprofiledriven=TRUE impedanceprofileid={20A9D3A6-B0EB-4B75-B440-677AE738CD6D} impedanceprofilevalue=50.000000 minimp=50.000000 maximp=50.000000 favimp=50.000000
Width RGMII1_Z50 [InNetClass('RGMII1')] p6: maxlimit=0.14 minlimit=0.11 preferedwidth=0.11 toplayer_minwidth=0.14 toplayer_prefwidth=0.14 midlayer1_maxwidth=0.11 midlayer5_maxwidth=0.11 bottomlayer_minwidth=0.14 bottomlayer_prefwidth=0.14 impedanceprofiledriven=TRUE impedanceprofileid={20A9D3A6-B0EB-4B75-B440-677AE738CD6D} impedanceprofilevalue=50.000000 minimp=50.000000 maximp=50.000000 favimp=50.000000
Width SDIO_Z50 [InNetClass('SD')] p7: maxlimit=0.14 minlimit=0.11 preferedwidth=0.11 toplayer_minwidth=0.14 toplayer_prefwidth=0.14 midlayer1_maxwidth=0.11 midlayer5_maxwidth=0.11 bottomlayer_minwidth=0.14 bottomlayer_prefwidth=0.14 impedanceprofiledriven=TRUE impedanceprofileid={20A9D3A6-B0EB-4B75-B440-677AE738CD6D} impedanceprofilevalue=50.000000 minimp=50.000000 maximp=50.000000 favimp=50.000000
Width WL_BT_Z50 [InNet('WL_BT_ANT')] p8: maxlimit=0.14 minlimit=0.11 preferedwidth=0.11 toplayer_minwidth=0.14 toplayer_prefwidth=0.14 midlayer1_maxwidth=0.11 midlayer5_maxwidth=0.11 bottomlayer_minwidth=0.14 bottomlayer_prefwidth=0.14 impedanceprofiledriven=TRUE impedanceprofileid={20A9D3A6-B0EB-4B75-B440-677AE738CD6D} impedanceprofilevalue=50.000000 minimp=50.000000 maximp=50.000000 favimp=50.000000
Width eMCC_WithinRoom [InNetClass('eMMC') and WithinRoom('eMMC')] p9: maxlimit=0.254 minlimit=0.1 preferedwidth=0.1
Width eMMC_Z50 [InNetClass('eMMC')] p10: maxlimit=0.14 minlimit=0.11 preferedwidth=0.11 toplayer_minwidth=0.14 toplayer_prefwidth=0.14 midlayer1_maxwidth=0.11 midlayer5_maxwidth=0.11 bottomlayer_minwidth=0.14 bottomlayer_prefwidth=0.14 impedanceprofiledriven=TRUE impedanceprofileid={20A9D3A6-B0EB-4B75-B440-677AE738CD6D} impedanceprofilevalue=50.000000 minimp=50.000000 maximp=50.000000 favimp=50.000000
Width WL_SDIO_Z50 [InNetClass('WL_SDIO')] p11: maxlimit=0.14 minlimit=0.11 preferedwidth=0.11 toplayer_minwidth=0.14 toplayer_prefwidth=0.14 midlayer1_maxwidth=0.11 midlayer5_maxwidth=0.11 bottomlayer_minwidth=0.14 bottomlayer_prefwidth=0.14 impedanceprofiledriven=TRUE impedanceprofileid={20A9D3A6-B0EB-4B75-B440-677AE738CD6D} impedanceprofilevalue=50.000000 minimp=50.000000 maximp=50.000000 favimp=50.000000
Width Width_Layer_18µm [InLayerClass('Layer_18µm')] p12: maxlimit=5 minlimit=0.1 preferedwidth=0.2
Width Width_Layer_35µm [InLayerClass('Layer_35µm')] p13: maxlimit=5 minlimit=0.11 preferedwidth=0.2 minimp=50.000000 maximp=50.000000 favimp=50.000000
Width [All] p14: maxlimit=5 minlimit=0.1 preferedwidth=0.11
17 further rules are at their usual default settings.

## Classes and differential pairs
net class GPS_MODE: GPS_CTRL.GPS_MODE
net class USB_UART_DBG: USB_UART_DBG.USB_UART_DBG_D_N USB_UART_DBG.USB_UART_DBG_D_P
net class USB_DBG: USB_DBG.USB_DBG_D_N USB_DBG.USB_DBG_D_P
net class PMIC_VDC: PMIC_VDC
net class WL_BT_CTRL: BT_EN_HOST BT_WAKE WAKE_BT WL_BT_CTRL.WL_EN WL_BT_CTRL.WL_HOST_WAKE
net class WDT_CTRL: HARD_RESETn WDT_CTRL.WDT_EN WDT_CTRL.WDT_WDI
net class SD_SDIO: SD_SDIO.SDMMC0_CLK SD_SDIO.SDMMC0_CMD SD_SDIO.SDMMC0_D0 SD_SDIO.SDMMC0_D1 SD_SDIO.SDMMC0_D2 SD_SDIO.SDMMC0_D3 SD_SDIO.SDMMC0_DET
net class RTC_CTRL: RTC_CTRL.RTC_I2C5_SCL RTC_CTRL.RTC_I2C5_SDA
net class mPCIe3_SPI3: mPCIe3_SPI3.SPI3_CLK mPCIe3_SPI3.SPI3_CS0 mPCIe3_SPI3.SPI3_MISO mPCIe3_SPI3.SPI3_MOSI
net class mPCIe3_PCIE30_CTRL: mPCIe3_PCIE30_CTRL.PCIE2_CLK_N mPCIe3_PCIE30_CTRL.PCIE2_CLK_P mPCIe3_PCIE30_CTRL.PCIE30_0PERSTn mPCIe3_PCIE30_CTRL.PCIE30_CLKREQ0 mPCIe3_PCIE30_CTRL.PCIE30_CLKREQ1 mPCIe3_PCIE30_CTRL.PCIE30_WAKEn
net class HDMI_CTRL: HDMI_CTRL.HDMI_TX_CEC HDMI_CTRL.HDMI_TX_HPD HDMI_CTRL.HDMI_TX_SCL HDMI_CTRL.HDMI_TX_SDA
net class GPS_CTRL: GPS_CTRL.GPS_INT GPS_CTRL.GPS_MODE GPS_CTRL.GPS_PPS GPS_CTRL.GPS_RST GPS_CTRL.GPS_UART_RX GPS_CTRL.GPS_UART_TX
net class GMAC1_TX: GMAC1_TX.GMAC1_TXCLK GMAC1_TX.GMAC1_TXD0 GMAC1_TX.GMAC1_TXD1 GMAC1_TX.GMAC1_TXD2 GMAC1_TX.GMAC1_TXD3 GMAC1_TX.GMAC1_TXEN
net class GMAC1_RX: GMAC1_RX.GMAC1_RXCLK GMAC1_RX.GMAC1_RXD0 GMAC1_RX.GMAC1_RXD1 GMAC1_RX.GMAC1_RXD2 GMAC1_RX.GMAC1_RXD3 GMAC1_RX.GMAC1_RXDV_CRS
net class GMAC1_CTRL: GMAC1_CTRL.PHY1_CLKOUT GMAC1_CTRL.PHY1_INT GMAC1_CTRL.PHY1_MDC GMAC1_CTRL.PHY1_MDIO GMAC1_CTRL.PHY1_RSTn
net class GMAC0_TX: GMAC0_TX.GMAC0_TXCLK GMAC0_TX.GMAC0_TXD0 GMAC0_TX.GMAC0_TXD1 GMAC0_TX.GMAC0_TXD2 GMAC0_TX.GMAC0_TXD3 GMAC0_TX.GMAC0_TXEN
net class GMAC0_RX: GMAC0_RX.GMAC0_RXCLK GMAC0_RX.GMAC0_RXD0 GMAC0_RX.GMAC0_RXD1 GMAC0_RX.GMAC0_RXD2 GMAC0_RX.GMAC0_RXD3 GMAC0_RX.GMAC0_RXDV_CRS
net class GMAC0_CTRL: GMAC0_CTRL.PHY0_CLKOUT GMAC0_CTRL.PHY0_INT GMAC0_CTRL.PHY0_MDIO GMAC0_CTRL.PHY0_RSTn GMAC0_CTRL.PHY1_MDC
net class eMMC_SDIO: eMMC_CLKOUT eMMC_CMD eMMC_D0 eMMC_D1 eMMC_D2 eMMC_D3 eMMC_D4 eMMC_D5 eMMC_D6 eMMC_D7 eMMC_DATA_STROBE
net class EEPROM_I2C3: EEPROM_I2C3.EEPROM_I2C3_I2C3_SCL EEPROM_I2C3.EEPROM_I2C3_I2C3_SDA
net class EEPROM_CTRL: EEPROM_CTRL.EEPROM_WP_CPU_0 EEPROM_CTRL.EEPROM_WP_CPU_1
net class CAM_I2C4: CAM_I2C4.CAM_I2C4_SCL CAM_I2C4.CAM_I2C4_SDA
net class BT_UART: BT_UART8_CTS BT_UART8_RTS BT_UART8_RX BT_UART8_TX
component class A23: X32
net class SIM_DET: SIM1_DET SIM2_DET
net class PMIC_PWRON: PMIC_PWRON
net class mPCIe_I2C: mPCIe_I2C.mPCIe_I2C_SCL mPCIe_I2C.mPCIe_I2C_SDA
net class mPCIe_GPIO: mPCIe1_RST mPCIe_GPIO.SIM_SEL
net class mPCIE30: mPCIE30.MUX_mPCIE30_RX0_N mPCIE30.MUX_mPCIE30_RX0_P mPCIE30.MUX_mPCIE30_TX0_N mPCIE30.MUX_mPCIE30_TX0_P mPCIE30.PCIE30_CLKREQ2
net class mPCIe3_PCIE30: mPCIe3_PCIE30.PCIE30_1PERSTn mPCIe3_PCIE30.PCIE30_REFCLK_N mPCIe3_PCIE30.PCIE30_REFCLK_P mPCIe3_PCIE30.PCIE30_RX0_N mPCIe3_PCIE30.PCIE30_RX0_P mPCIe3_PCIE30.PCIE30_RX1_N mPCIe3_PCIE30.PCIE30_RX1_P mPCIe3_PCIE30.PCIE30_TX0_N mPCIe3_PCIE30.PCIE30_TX0_P mPCIe3_PCIE30.PCIE30_TX1_N mPCIe3_PCIE30.PCIE30_TX1_P mPCIe3_PCIE30.PLL_OE0
net class mPCIe3_PCIE20: mPCIe3_PCIE20.PCIE20_CLKREQ mPCIe3_PCIE20.PCIE20_PERSTn mPCIe3_PCIE20.PCIE20_REFCLK_N mPCIe3_PCIE20.PCIE20_REFCLK_P mPCIe3_PCIE20.PCIE20_RX_N mPCIe3_PCIE20.PCIE20_RX_P mPCIe3_PCIE20.PCIE20_TX_N mPCIe3_PCIE20.PCIE20_TX_P
net class MIPI_CSI: CAM_IO0 CAM_IO1 MIPI_CSI.MIPI_CSI_RX_CLK0_N MIPI_CSI.MIPI_CSI_RX_CLK0_P MIPI_CSI.MIPI_CSI_RX_D0_N MIPI_CSI.MIPI_CSI_RX_D0_P MIPI_CSI.MIPI_CSI_RX_D1_N MIPI_CSI.MIPI_CSI_RX_D1_P
net class LVDS: LVDS_LANE.LVDS_TX0_CLK_N LVDS_LANE.LVDS_TX0_CLK_P LVDS_LANE.LVDS_TX0_D0_N LVDS_LANE.LVDS_TX0_D0_P LVDS_LANE.LVDS_TX0_D1_N LVDS_LANE.LVDS_TX0_D1_P LVDS_LANE.LVDS_TX0_D2_N LVDS_LANE.LVDS_TX0_D2_P LVDS_LANE.LVDS_TX0_D3_N LVDS_LANE.LVDS_TX0_D3_P
net class LVDS_LANE: LVDS_LANE.LVDS_TX0_CLK_N LVDS_LANE.LVDS_TX0_CLK_P LVDS_LANE.LVDS_TX0_D0_N LVDS_LANE.LVDS_TX0_D0_P LVDS_LANE.LVDS_TX0_D1_N LVDS_LANE.LVDS_TX0_D1_P LVDS_LANE.LVDS_TX0_D2_N LVDS_LANE.LVDS_TX0_D2_P LVDS_LANE.LVDS_TX0_D3_N LVDS_LANE.LVDS_TX0_D3_P
net class HARD_RESETn: HARD_RESETn
net class FSPI: BMC_QSPI_CS BMC_QSPI_D0 BMC_QSPI_D1 BMC_QSPI_D2 BMC_QSPI_D3 BMC_QSPI_SCLK FQSPI_CS FQSPI_D0 FQSPI_D1 FQSPI_D2 FQSPI_D3 FQSPI_FLASH.FQSPI_SCLK NetD26_1 NetD32_4 NetD32_6 NetD32_7 NetD32_9 QSPI_CS QSPI_D0 QSPI_D1 QSPI_D2 QSPI_D3 QSPI_FLASH.QSPI_SCLK
net class FQSPI_FLASH: FQSPI_CS FQSPI_D0 FQSPI_D1 FQSPI_D2 FQSPI_D3 FQSPI_FLASH.FQSPI_SCLK
net class DISP_CTRL: DISP_CTRL.DISP_INT DISP_CTRL.DISP_PWM DISP_CTRL.DISP_RST DISP_CTRL.DISP_STBYB
net class BMC_CTRL: BMC_CTRL.OP_STATE BMC_CTRL.OTG_DIS BMC_CTRL.RESETn
net class USB2_mPCIe: USB2_mPCIe.USB2_mPCIe_D_N USB2_mPCIe.USB2_mPCIe_D_P
net class RTC_CLK: RTC_32KHZ
net class QSPI_FLASH: QSPI_CS QSPI_D0 QSPI_D1 QSPI_D2 QSPI_D3 QSPI_FLASH.QSPI_SCLK
net class mPCIe1_SIM: mPCIe1_SIM mPCIe1_SIM_CLK mPCIe1_SIM_IO mPCIe1_SIM_RST mPCIe1_SIMCON_VCC SIM1_VPP
net class PCIE_CLK: CLK_100M0_N CLK_100M0_P CLK_100M1_N CLK_100M1_P CLK_100M2_N CLK_100M2_P CLK_100M3_N CLK_100M3_P mPCIe3_PCIE20.PCIE20_REFCLK_N mPCIe3_PCIE20.PCIE20_REFCLK_P mPCIe3_PCIE30.PCIE30_REFCLK_N mPCIe3_PCIE30.PCIE30_REFCLK_P mPCIe3_PCIE30_CTRL.PCIE2_CLK_N mPCIe3_PCIE30_CTRL.PCIE2_CLK_P PCIE0_CLK_N PCIE0_CLK_P PCIE1_CLK_N PCIE1_CLK_P
differential pair class A_DRAM_CLK: A_DRAM_CLK
net class RGMII1: GMAC1_RX.GMAC1_RXCLK GMAC1_RX.GMAC1_RXD0 GMAC1_RX.GMAC1_RXD1 GMAC1_RX.GMAC1_RXD2 GMAC1_RX.GMAC1_RXD3 GMAC1_RX.GMAC1_RXDV_CRS GMAC1_TX.GMAC1_TXCLK GMAC1_TX.GMAC1_TXD0 GMAC1_TX.GMAC1_TXD1 GMAC1_TX.GMAC1_TXD2 GMAC1_TX.GMAC1_TXD3 GMAC1_TX.GMAC1_TXEN PHY1_PHYAD0 PHY1_PHYAD1 PHY1_PHYAD2 PHY1_RXD0 PHY1_RXD1 PHY1_RXD2 PHY1_TXCLK PHY1_TXD0 PHY1_TXD1 PHY1_TXD2 PHY1_TXD3 PHY1_TXEN
net class ETH1_MDI: PHY1_MDI0_N PHY1_MDI0_P PHY1_MDI1_N PHY1_MDI1_P PHY1_MDI2_N PHY1_MDI2_P PHY1_MDI3_N PHY1_MDI3_P
differential pair class DRAM_STROBE1_B_Diff: B_DRAM_DQS1
differential pair class DRAM_STROBE1_A_Diff: A_DRAM_DQS1
differential pair class DRAM_STROBE0_B_Diff: B_DRAM_DQS0
differential pair class DRAM_STROBE0_A_Diff: A_DRAM_DQS0
differential pair class B_DRAM_CLK: B_DRAM_CLK
net class DRAM_CA: A_DRAM_CA0 A_DRAM_CA1 A_DRAM_CA2 A_DRAM_CA3 A_DRAM_CA4 A_DRAM_CA5 A_DRAM_CKE0 A_DRAM_CKE1 A_DRAM_CS0 A_DRAM_CS1 A_DRAM_ODT_CA B_DRAM_CA0 B_DRAM_CA1 B_DRAM_CA2 B_DRAM_CA3 B_DRAM_CA4 B_DRAM_CA5 B_DRAM_CKE0 B_DRAM_CKE1 B_DRAM_CS0 B_DRAM_CS1
net class DRAM_STROBE_1: B_DRAM_DATA0 B_DRAM_DATA1 B_DRAM_DATA2 B_DRAM_DATA3 B_DRAM_DATA4 B_DRAM_DATA5 B_DRAM_DATA6 B_DRAM_DATA7 B_DRAM_DATA8 B_DRAM_DATA9 B_DRAM_DATA10 B_DRAM_DATA11 B_DRAM_DATA12 B_DRAM_DATA13 B_DRAM_DATA14 B_DRAM_DATA15 B_DRAM_DMI0 B_DRAM_DMI1
net class DRAM_STROBE_0: A_DRAM_DATA0 A_DRAM_DATA1 A_DRAM_DATA2 A_DRAM_DATA3 A_DRAM_DATA4 A_DRAM_DATA5 A_DRAM_DATA6 A_DRAM_DATA7 A_DRAM_DATA8 A_DRAM_DATA9 A_DRAM_DATA10 A_DRAM_DATA11 A_DRAM_DATA12 A_DRAM_DATA13 A_DRAM_DATA14 A_DRAM_DATA15 A_DRAM_DMI0 A_DRAM_DMI1
net class PCIE_Z85: M2_PCIE30_TX0_N M2_PCIE30_TX0_P MINIPCIE20_TX_N MINIPCIE20_TX_P MINIPCIE30_TX0_N MINIPCIE30_TX0_P MINIPCIE30_TX1_N MINIPCIE30_TX1_P mPCIe3_PCIE20.PCIE20_RX_N mPCIe3_PCIE20.PCIE20_RX_P mPCIe3_PCIE20.PCIE20_TX_N mPCIe3_PCIE20.PCIE20_TX_P mPCIe3_PCIE30.PCIE30_RX0_N mPCIe3_PCIE30.PCIE30_RX0_P mPCIe3_PCIE30.PCIE30_RX1_N mPCIe3_PCIE30.PCIE30_RX1_P mPCIe3_PCIE30.PCIE30_TX0_N mPCIe3_PCIE30.PCIE30_TX0_P mPCIe3_PCIE30.PCIE30_TX1_N mPCIe3_PCIE30.PCIE30_TX1_P mPCIE30.MUX_mPCIE30_RX0_N mPCIE30.MUX_mPCIE30_RX0_P mPCIE30.MUX_mPCIE30_TX0_N mPCIE30.MUX_mPCIE30_TX0_P MUX_M2_PCIE30_RX0_N MUX_M2_PCIE30_RX0_P MUX_M2_PCIE30_TX0_N MUX_M2_PCIE30_TX0_P
net class USB: CH_D_N CH_D_P USB2_AUDIO_D_N USB2_AUDIO_D_P USB2_HUB_D_N USB2_HUB_D_P USB2_LTE1_D_N USB2_LTE1_D_P USB2_LTE2_D_N USB2_LTE2_D_P USB2_mPCIe.USB2_mPCIe_D_N USB2_mPCIe.USB2_mPCIe_D_P USB2_RS_D_N USB2_RS_D_P USB3_HOST1_D_N USB3_HOST1_D_P USB3_HOST1_SSRX_N USB3_HOST1_SSRX_P USB3_HOST1_SSTX_N USB3_HOST1_SSTX_P USB3_HOST1SSTX_N USB3_HOST1SSTX_P USB3_OTG0_D_N USB3_OTG0_D_P USB3_OTG0_SSRX_N USB3_OTG0_SSRX_P USB3_OTG0_SSTX_N USB3_OTG0_SSTX_P USB3_OTG0SSTX_N USB3_OTG0SSTX_P USB3HOST1_D_N USB3HOST1_D_P USB3OTG0_D_N USB3OTG0_D_P USB_AUDIO_D_N USB_AUDIO_D_P USB_BMC_D_N USB_BMC_D_P USB_CONSL_D_N USB_CONSL_D_P USB_CONSL_RSVD_D_N USB_CONSL_RSVD_D_P USB_DBG.USB_DBG_D_N USB_DBG.USB_DBG_D_P USB_PD_D_N USB_PD_D_P USB_UART_DBG.USB_UART_DBG_D_N USB_UART_DBG.USB_UART_DBG_D_P USBR_BMC_D_N USBR_BMC_D_P
net class WL_SDIO: WL_SDIO.WL_SDIO_CLK WL_SDIO.WL_SDIO_CMD WL_SDIO.WL_SDIO_D0 WL_SDIO.WL_SDIO_D1 WL_SDIO.WL_SDIO_D2 WL_SDIO.WL_SDIO_D3
net class SD: NetR168_2 NetR169_2 NetR170_2 NetR172_2 NetR173_2 NetR174_2 SD_SDIO.SDMMC0_CLK SD_SDIO.SDMMC0_CMD SD_SDIO.SDMMC0_D0 SD_SDIO.SDMMC0_D1 SD_SDIO.SDMMC0_D2 SD_SDIO.SDMMC0_D3 SD_SDIO.SDMMC0_DET SDMMC0_CLK_SD
net class RGMII0: GMAC0_RX.GMAC0_RXCLK GMAC0_RX.GMAC0_RXD0 GMAC0_RX.GMAC0_RXD1 GMAC0_RX.GMAC0_RXD2 GMAC0_RX.GMAC0_RXD3 GMAC0_RX.GMAC0_RXDV_CRS GMAC0_TX.GMAC0_TXCLK GMAC0_TX.GMAC0_TXD0 GMAC0_TX.GMAC0_TXD1 GMAC0_TX.GMAC0_TXD2 GMAC0_TX.GMAC0_TXD3 GMAC0_TX.GMAC0_TXEN PHY0_PHYAD0 PHY0_PHYAD1 PHY0_PHYAD2 PHY0_RXD0 PHY0_RXD1 PHY0_RXD2 PHY0_TXCLK PHY0_TXD0 PHY0_TXD1 PHY0_TXD2 PHY0_TXD3 PHY0_TXEN
net class HDMI: HDMI_PORT_TX0_N HDMI_PORT_TX0_P HDMI_PORT_TX1_N HDMI_PORT_TX1_P HDMI_PORT_TX2_N HDMI_PORT_TX2_P HDMI_PORT_TXCLK_N HDMI_PORT_TXCLK_P HDMI_TX0_N HDMI_TX0_P HDMI_TX1_N HDMI_TX1_P HDMI_TX2_N HDMI_TX2_P HDMI_TXCLK_N HDMI_TXCLK_P
net class ETH0_MDI: PHY0_MDI0_N PHY0_MDI0_P PHY0_MDI1_N PHY0_MDI1_P PHY0_MDI2_N PHY0_MDI2_P PHY0_MDI3_N PHY0_MDI3_P
net class eMMC: eMMC_CLKOUT eMMC_CMD eMMC_D0 eMMC_D1 eMMC_D2 eMMC_D3 eMMC_D4 eMMC_D5 eMMC_D6 eMMC_D7
component class A18: S1 S2
differential pair USBR_BMC_D: +USBR_BMC_D_P -USBR_BMC_D_N
differential pair USB_UART_DBG.USB_UART_DBG_D: +USB_UART_DBG.USB_UART_DBG_D_P -USB_UART_DBG.USB_UART_DBG_D_N
differential pair USB_BMC_D: +USB_BMC_D_P -USB_BMC_D_N
differential pair USB_DBG.USB_DBG_D: +USB_DBG.USB_DBG_D_P -USB_DBG.USB_DBG_D_N
differential pair mPCIe3_PCIE30_CTRL.PCIE2_CLK: +mPCIe3_PCIE30_CTRL.PCIE2_CLK_P -mPCIe3_PCIE30_CTRL.PCIE2_CLK_N
differential pair MUX_M2_PCIE30_TX0: +MUX_M2_PCIE30_TX0_P -MUX_M2_PCIE30_TX0_N
differential pair MUX_M2_PCIE30_RX0: +MUX_M2_PCIE30_RX0_P -MUX_M2_PCIE30_RX0_N
differential pair mPCIE30.MUX_mPCIE30_TX0: +mPCIE30.MUX_mPCIE30_TX0_P -mPCIE30.MUX_mPCIE30_TX0_N
differential pair mPCIE30.MUX_mPCIE30_RX0: +mPCIE30.MUX_mPCIE30_RX0_P -mPCIE30.MUX_mPCIE30_RX0_N
differential pair mPCIe3_PCIE30.PCIE30_TX1: +mPCIe3_PCIE30.PCIE30_TX1_P -mPCIe3_PCIE30.PCIE30_TX1_N
differential pair mPCIe3_PCIE30.PCIE30_TX0: +mPCIe3_PCIE30.PCIE30_TX0_P -mPCIe3_PCIE30.PCIE30_TX0_N
differential pair mPCIe3_PCIE30.PCIE30_RX1: +mPCIe3_PCIE30.PCIE30_RX1_P -mPCIe3_PCIE30.PCIE30_RX1_N
differential pair mPCIe3_PCIE30.PCIE30_RX0: +mPCIe3_PCIE30.PCIE30_RX0_P -mPCIe3_PCIE30.PCIE30_RX0_N
differential pair mPCIe3_PCIE30.PCIE30_REFCLK: +mPCIe3_PCIE30.PCIE30_REFCLK_P -mPCIe3_PCIE30.PCIE30_REFCLK_N
differential pair mPCIe3_PCIE20.PCIE20_TX: +mPCIe3_PCIE20.PCIE20_TX_P -mPCIe3_PCIE20.PCIE20_TX_N
differential pair mPCIe3_PCIE20.PCIE20_RX: +mPCIe3_PCIE20.PCIE20_RX_P -mPCIe3_PCIE20.PCIE20_RX_N
differential pair mPCIe3_PCIE20.PCIE20_REFCLK: +mPCIe3_PCIE20.PCIE20_REFCLK_P -mPCIe3_PCIE20.PCIE20_REFCLK_N
differential pair MIPI_CSI.MIPI_CSI_RX_D1: +MIPI_CSI.MIPI_CSI_RX_D1_P -MIPI_CSI.MIPI_CSI_RX_D1_N
differential pair MIPI_CSI.MIPI_CSI_RX_D0: +MIPI_CSI.MIPI_CSI_RX_D0_P -MIPI_CSI.MIPI_CSI_RX_D0_N
differential pair MIPI_CSI.MIPI_CSI_RX_CLK0: +MIPI_CSI.MIPI_CSI_RX_CLK0_P -MIPI_CSI.MIPI_CSI_RX_CLK0_N
differential pair M2_PCIE30_TX0: +M2_PCIE30_TX0_P -M2_PCIE30_TX0_N
differential pair LVDS_LANE.LVDS_TX0_D3: +LVDS_LANE.LVDS_TX0_D3_P -LVDS_LANE.LVDS_TX0_D3_N
differential pair LVDS_LANE.LVDS_TX0_D2: +LVDS_LANE.LVDS_TX0_D2_P -LVDS_LANE.LVDS_TX0_D2_N
differential pair LVDS_LANE.LVDS_TX0_D1: +LVDS_LANE.LVDS_TX0_D1_P -LVDS_LANE.LVDS_TX0_D1_N
differential pair LVDS_LANE.LVDS_TX0_D0: +LVDS_LANE.LVDS_TX0_D0_P -LVDS_LANE.LVDS_TX0_D0_N
differential pair LVDS_LANE.LVDS_TX0_CLK: +LVDS_LANE.LVDS_TX0_CLK_P -LVDS_LANE.LVDS_TX0_CLK_N
differential pair CLK_100M3: +CLK_100M3_P -CLK_100M3_N
differential pair USB2_mPCIe.USB2_mPCIe_D: +USB2_mPCIe.USB2_mPCIe_D_P -USB2_mPCIe.USB2_mPCIe_D_N
differential pair USB_AUDIO_D: +USB_AUDIO_D_P -USB_AUDIO_D_N
differential pair USB3OTG0_D: +USB3OTG0_D_P -USB3OTG0_D_N
differential pair USB3HOST1_D: +USB3HOST1_D_P -USB3HOST1_D_N
differential pair USB2_AUDIO_D: +USB2_AUDIO_D_P -USB2_AUDIO_D_N
differential pair PCIE1_CLK: +PCIE1_CLK_P -PCIE1_CLK_N
differential pair PCIE0_CLK: +PCIE0_CLK_P -PCIE0_CLK_N
differential pair MINIPCIE30_TX1: +MINIPCIE30_TX1_P -MINIPCIE30_TX1_N
differential pair MINIPCIE30_TX0: +MINIPCIE30_TX0_P -MINIPCIE30_TX0_N
differential pair CLK_100M2: +CLK_100M2_P -CLK_100M2_N
differential pair CLK_100M1: +CLK_100M1_P -CLK_100M1_N
differential pair CLK_100M0: +CLK_100M0_P -CLK_100M0_N
differential pair USB_PD_D: +USB_PD_D_P -USB_PD_D_N
differential pair B_DRAM_DQS1: +B_DRAM_DQS1_P -B_DRAM_DQS1_N
differential pair B_DRAM_DQS0: +B_DRAM_DQS0_P -B_DRAM_DQS0_N
differential pair A_DRAM_DQS1: +A_DRAM_DQS1_P -A_DRAM_DQS1_N
differential pair A_DRAM_DQS0: +A_DRAM_DQS0_P -A_DRAM_DQS0_N
differential pair B_DRAM_CLK: +B_DRAM_CLK_P -B_DRAM_CLK_N
differential pair A_DRAM_CLK: +A_DRAM_CLK_P -A_DRAM_CLK_N
differential pair MINIPCIE20_TX: +MINIPCIE20_TX_P -MINIPCIE20_TX_N
differential pair USB3_OTG0SSTX: +USB3_OTG0SSTX_P -USB3_OTG0SSTX_N
differential pair USB3_OTG0_SSTX: +USB3_OTG0_SSTX_P -USB3_OTG0_SSTX_N
differential pair USB3_OTG0_SSRX: +USB3_OTG0_SSRX_P -USB3_OTG0_SSRX_N
differential pair USB3_OTG0_D: +USB3_OTG0_D_P -USB3_OTG0_D_N
differential pair USB3_HOST1SSTX: +USB3_HOST1SSTX_P -USB3_HOST1SSTX_N
differential pair USB3_HOST1_SSTX: +USB3_HOST1_SSTX_P -USB3_HOST1_SSTX_N
differential pair USB3_HOST1_SSRX: +USB3_HOST1_SSRX_P -USB3_HOST1_SSRX_N
differential pair USB3_HOST1_D: +USB3_HOST1_D_P -USB3_HOST1_D_N
differential pair USB2_RS_D: +USB2_RS_D_P -USB2_RS_D_N
differential pair USB2_LTE2_D: +USB2_LTE2_D_P -USB2_LTE2_D_N
differential pair USB2_LTE1_D: +USB2_LTE1_D_P -USB2_LTE1_D_N
differential pair USB2_HUB_D: +USB2_HUB_D_P -USB2_HUB_D_N
differential pair USB_CONSL_RSVD_D: +USB_CONSL_RSVD_D_P -USB_CONSL_RSVD_D_N
differential pair USB_CONSL_D: +USB_CONSL_D_P -USB_CONSL_D_N
differential pair PHY1_MDI3: +PHY1_MDI3_P -PHY1_MDI3_N
differential pair PHY1_MDI2: +PHY1_MDI2_P -PHY1_MDI2_N
differential pair PHY1_MDI1: +PHY1_MDI1_P -PHY1_MDI1_N
differential pair PHY1_MDI0: +PHY1_MDI0_P -PHY1_MDI0_N
differential pair PHY0_MDI3: +PHY0_MDI3_P -PHY0_MDI3_N
differential pair PHY0_MDI2: +PHY0_MDI2_P -PHY0_MDI2_N
differential pair PHY0_MDI1: +PHY0_MDI1_P -PHY0_MDI1_N
differential pair PHY0_MDI0: +PHY0_MDI0_P -PHY0_MDI0_N
differential pair HDMI_TXCLK: +HDMI_TXCLK_P -HDMI_TXCLK_N
differential pair HDMI_TX2: +HDMI_TX2_P -HDMI_TX2_N
differential pair HDMI_TX1: +HDMI_TX1_P -HDMI_TX1_N
differential pair HDMI_TX0: +HDMI_TX0_P -HDMI_TX0_N
differential pair HDMI_PORT_TXCLK: +HDMI_PORT_TXCLK_P -HDMI_PORT_TXCLK_N
differential pair HDMI_PORT_TX2: +HDMI_PORT_TX2_P -HDMI_PORT_TX2_N
differential pair HDMI_PORT_TX1: +HDMI_PORT_TX1_P -HDMI_PORT_TX1_N
differential pair HDMI_PORT_TX0: +HDMI_PORT_TX0_P -HDMI_PORT_TX0_N
differential pair CH_D: +CH_D_P -CH_D_N

## Components (designator, comment, footprint, x,y, rotation, side; value= is the part's Value field where it differs from the comment)
HL1 "XL-B3528RGBC-BM" XL-B3528RGBC-BM 13,8.6 r180 top locked
HL2 "XL-3216RGBC" XL-3216RGBC 12.957,8.584 r180 top
S1 "L-KLS7-TS5401-1.35-250-T" KLS7-TS5401 6,2.4 r180 bottom locked
S2 "SW-LEDX4-7-2_54" SW-LEDX4-7-2_54 6,4.521 r180 top locked
X32 "LEM-195" LEM-195 13,5.5 r0 top locked

## Footprints (in the part's own frame and the unit in brackets; to place one, negate y for a bottom-side part, rotate by r counter-clockwise, add the part's x,y. Pads: shape width x height; smd on the part's side, far side on the other; paste and mask are expansions set on the pad)
KLS7-TS5401 [mm]
  rect 1.3x0.9 smd mask+0.05: 1(-1.95,0.75) 2(1.95,0.75) 3(-1.95,-0.75) 4(1.95,-0.75)
  round 0.7 hole 0.7 unplated: ""(0,0.9)
  silkscreen extent -2.15,-1.4 2.15,1.4, body extent -2.25,-2.15 2.25,1.5, height 1.35
LEM-195 [mm]
  round 0 hole 2 unplated: 1(0,0) 2(0,-3)
  silkscreen extent -2.32,-4.83 2.38,4.8, body extent -1.78,-8.3 1.78,4.55, height 5.05
SW-LEDX4-7-2_54 [mil] "SW-LEDX4-7-2_54"
  round 59.1 hole 39.4: 1(-100,-11) 2(100,-11) L1(0,-11) L2(0,-111)
  round 19.69 hole 47.24 unplated: ""(0,111)
  silkscreen extent -152,-180 152,151, body extent -151,-192 152,336, height 299
XL-3216RGBC [mm]
  rect 0.9x0.7 smd paste+0 mask+0.05: 1(-1.2,0.5) 2(1.2,0.5) 3(-1.2,-0.5) 4(1.2,-0.5)
  silkscreen extent -0.57,-0.8 0.57,0.8, body extent -1.63,-0.5 1.57,0.5, height 1.5
XL-B3528RGBC-BM [mm]
  rect 1.305x0.9 smd paste+0 mask+0.051: 1(1.428,-0.75) 2(-1.428,-0.75) 3(1.428,0.75) 4(-1.428,0.75)
  silkscreen extent -1.68,-1.48 2.85,1.48, body extent -1.75,-1.4 1.75,1.4, height 1.9